# Altium PCB SP1100RS_V5.0.1.PcbDoc (part 1 of 2)
Units mm, origin at the board's own origin, x right, y up, seen from the top; angles counter-clockwise.
Board outline 126.12 x 87.13 mm, 4 copper layers (TopLayer, GND, PWR, BottomLayer); 167 components, 107 nets, 539 pads, 176 vias.
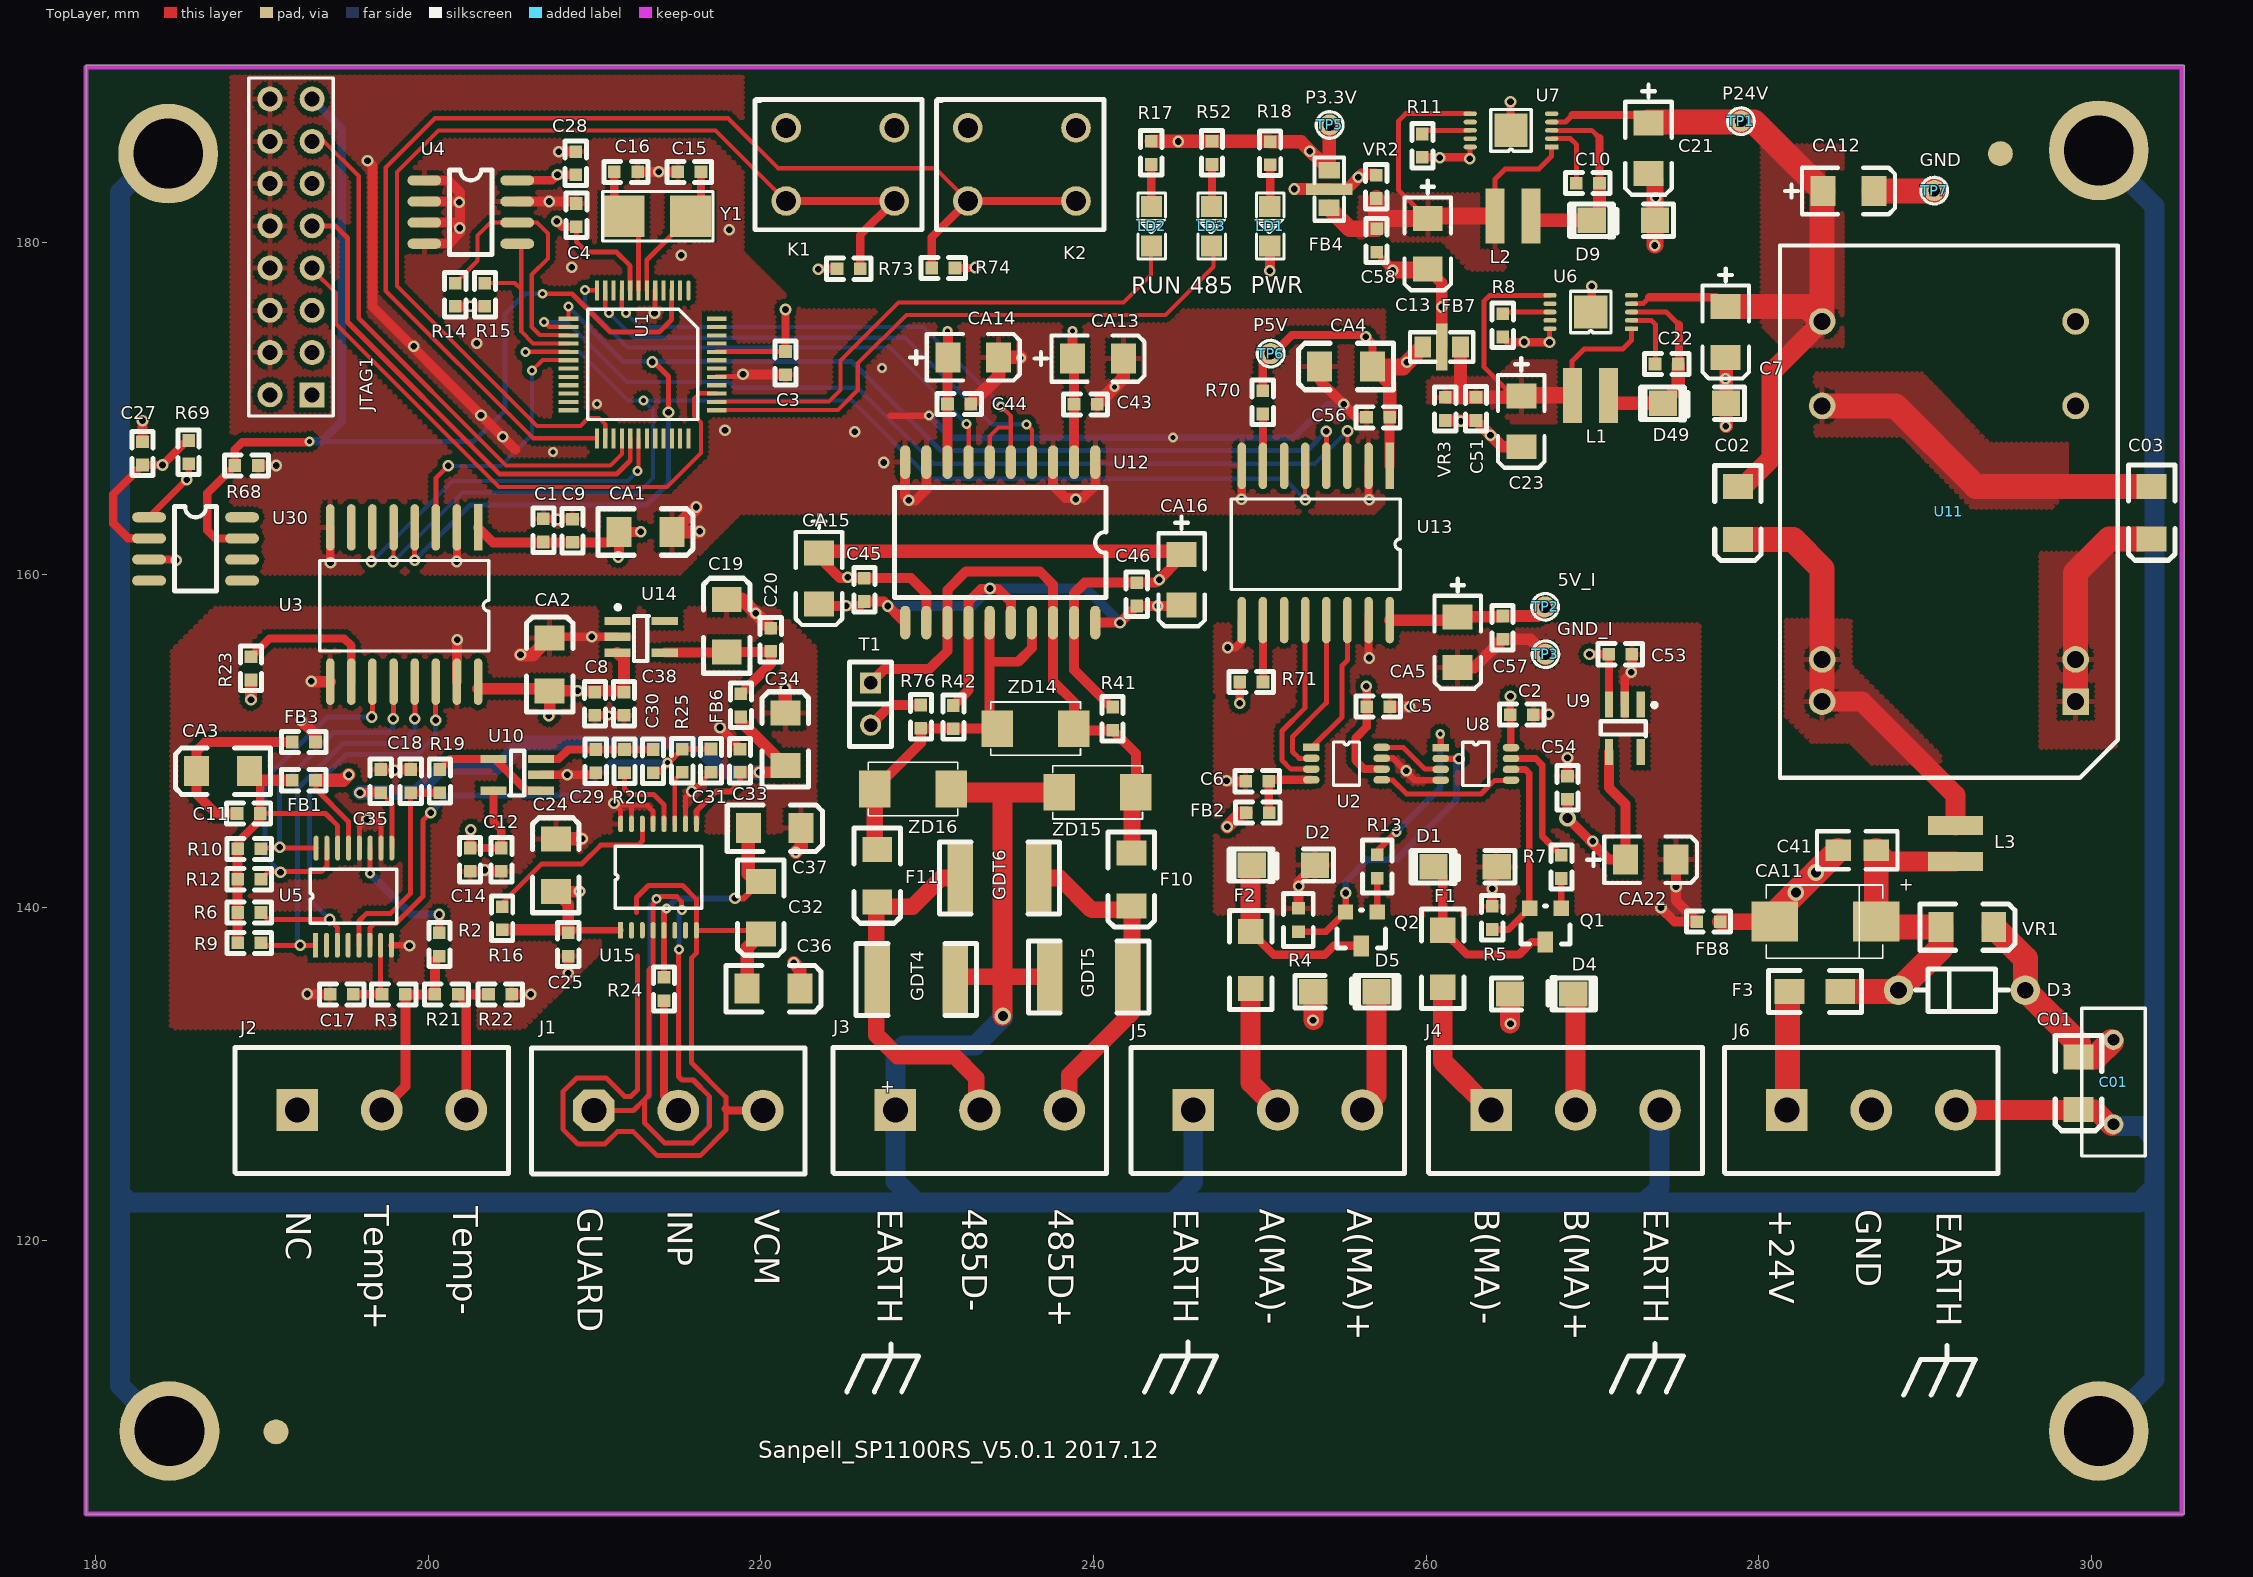
[diagram p0: TopLayer view]
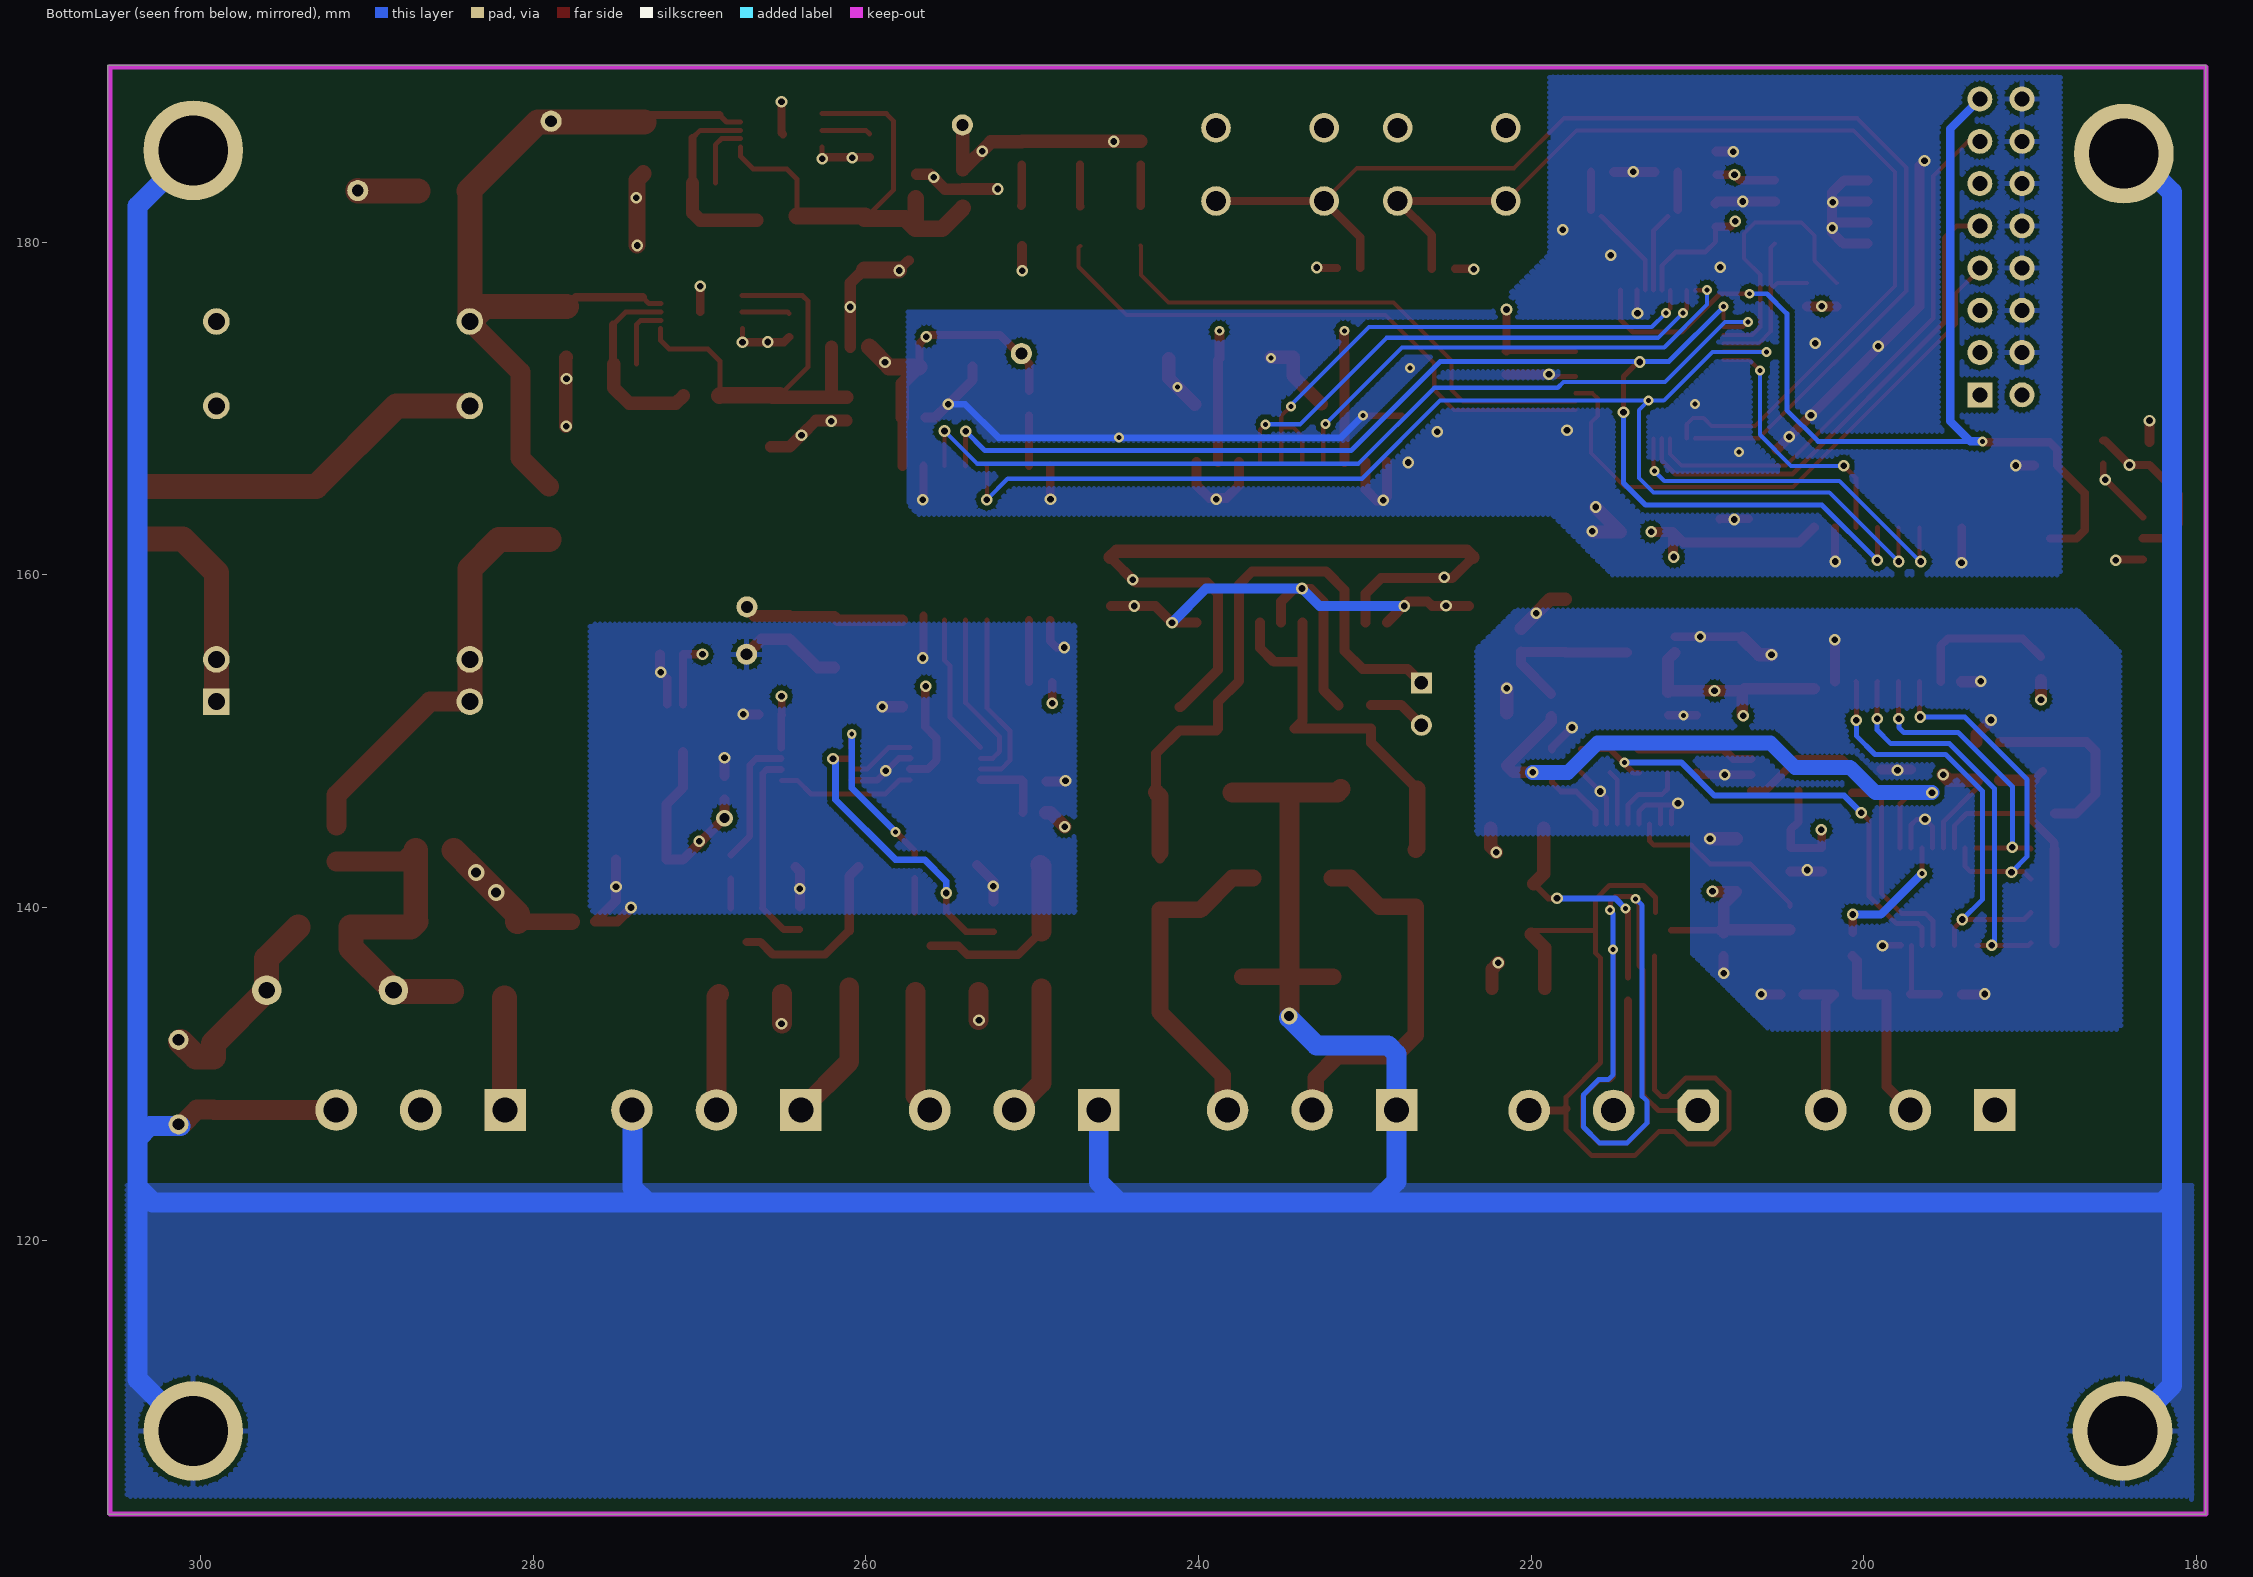
[diagram p1: BottomLayer view, seen from below]
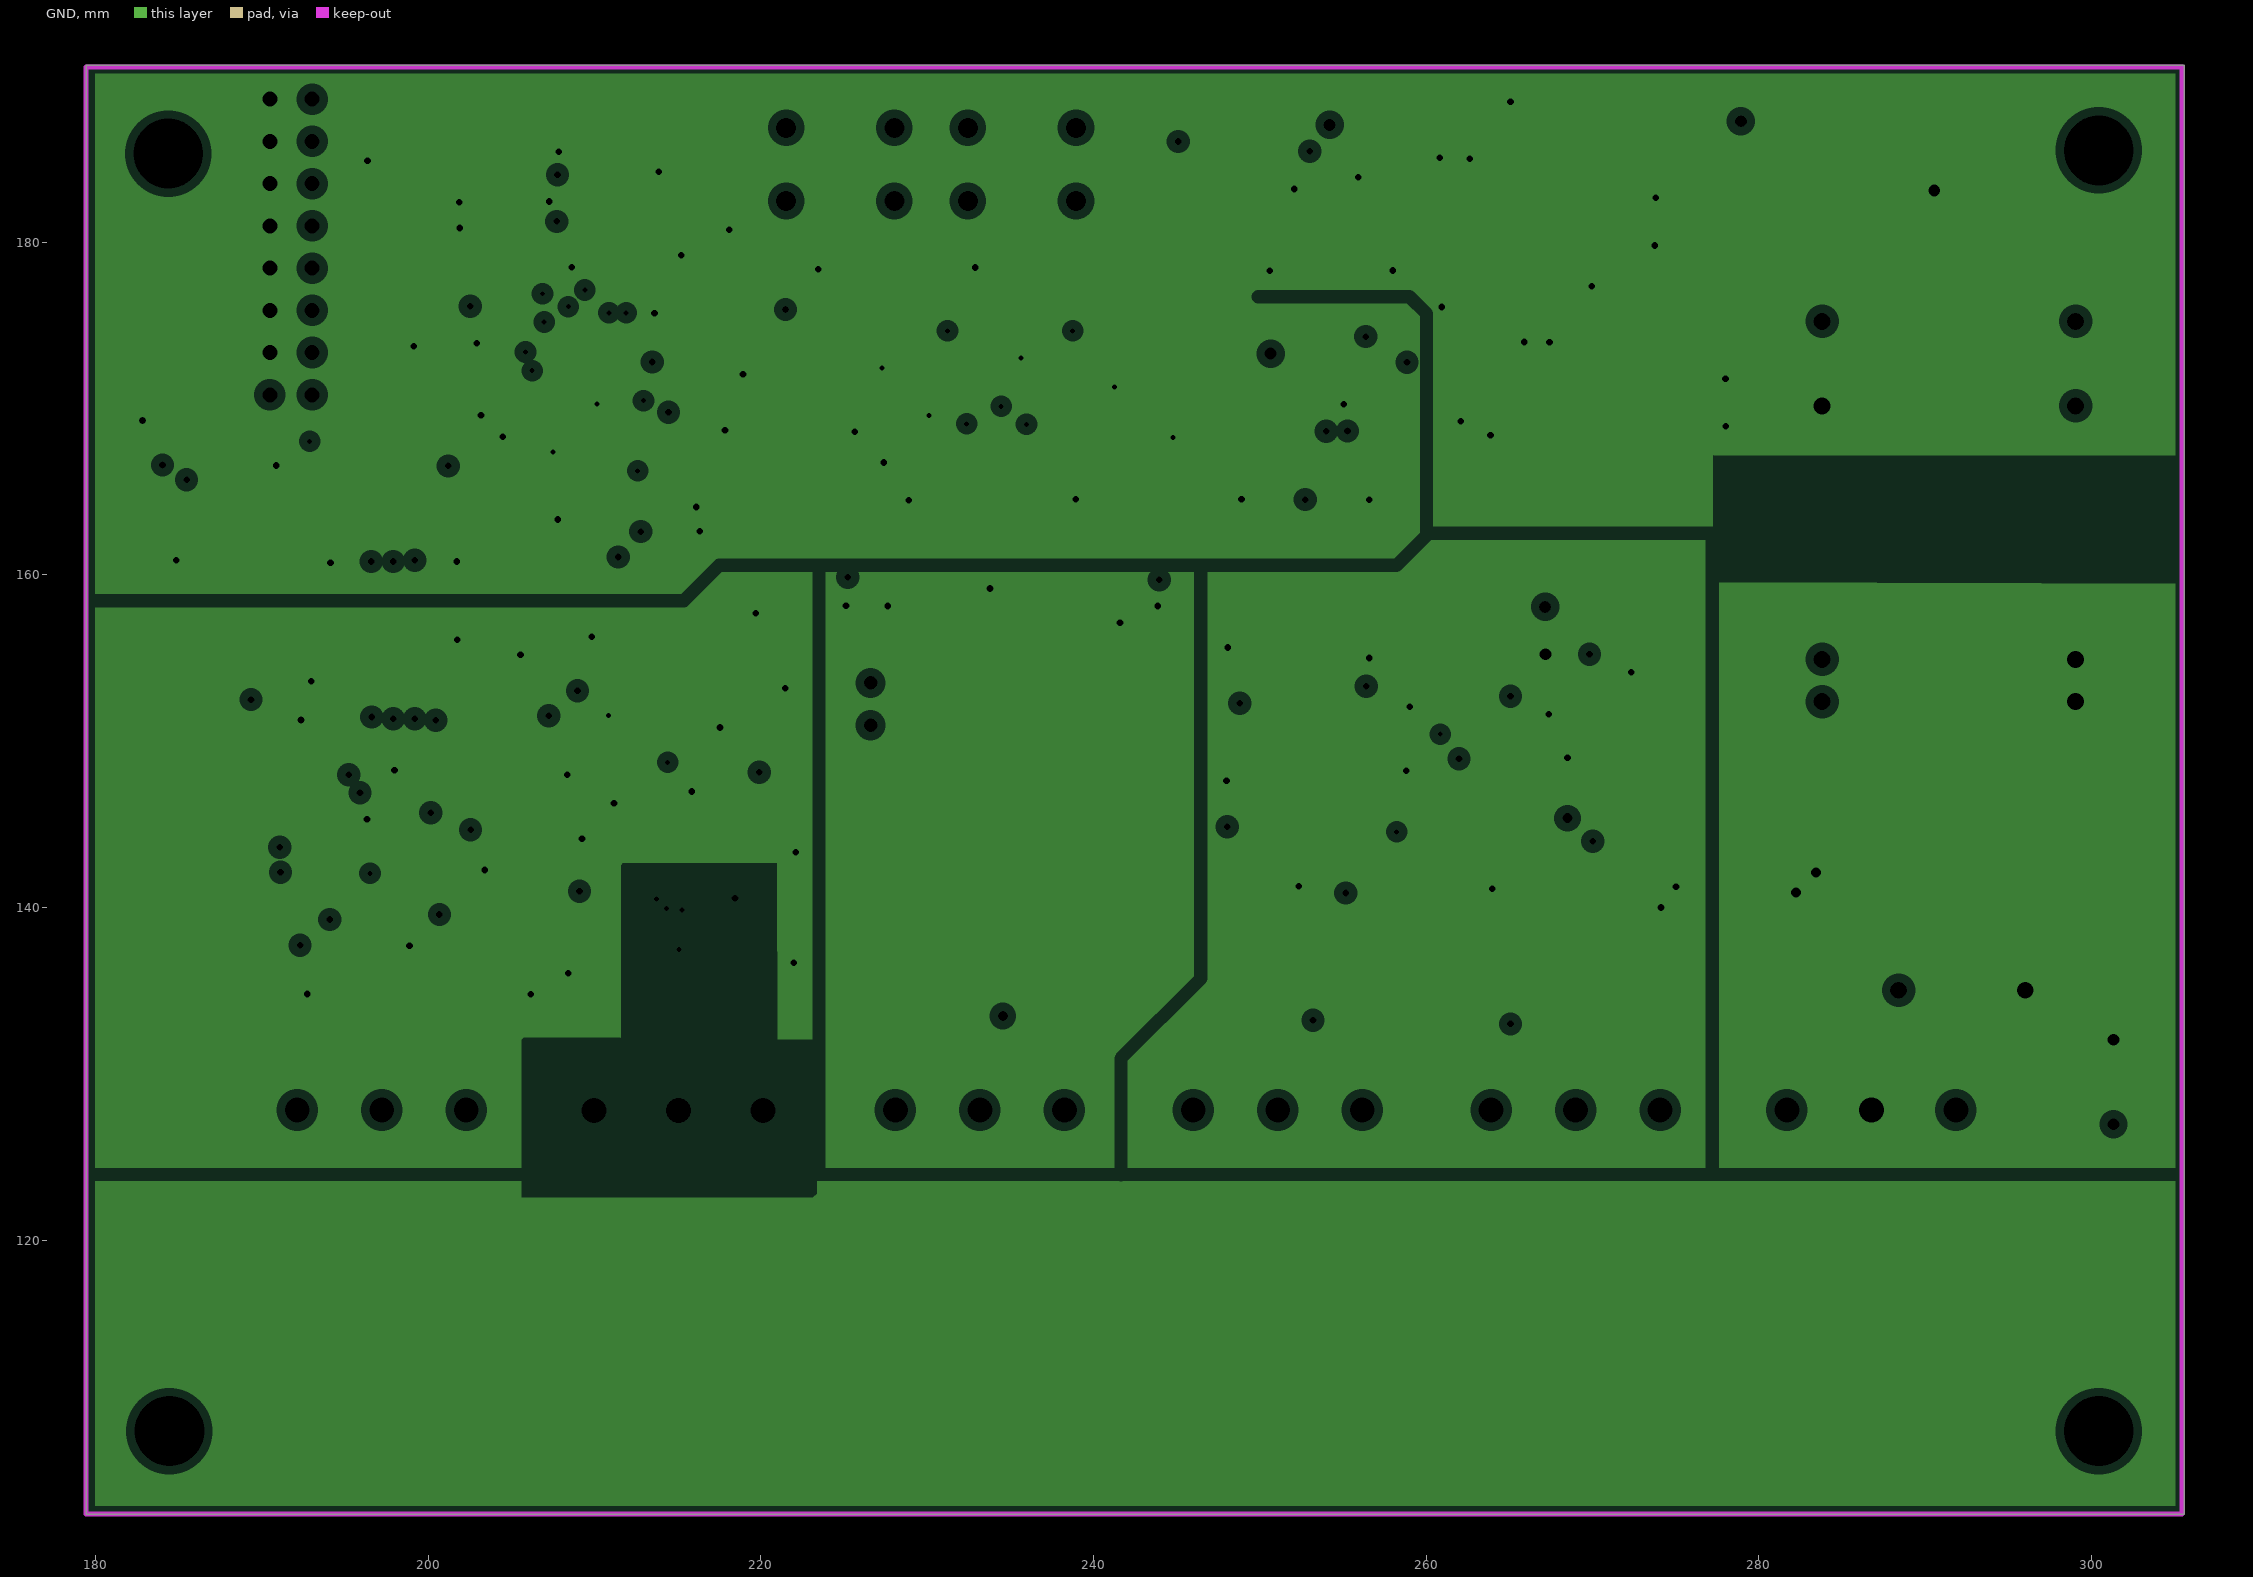
[diagram p2: GND, clearances drawn from the general rule]
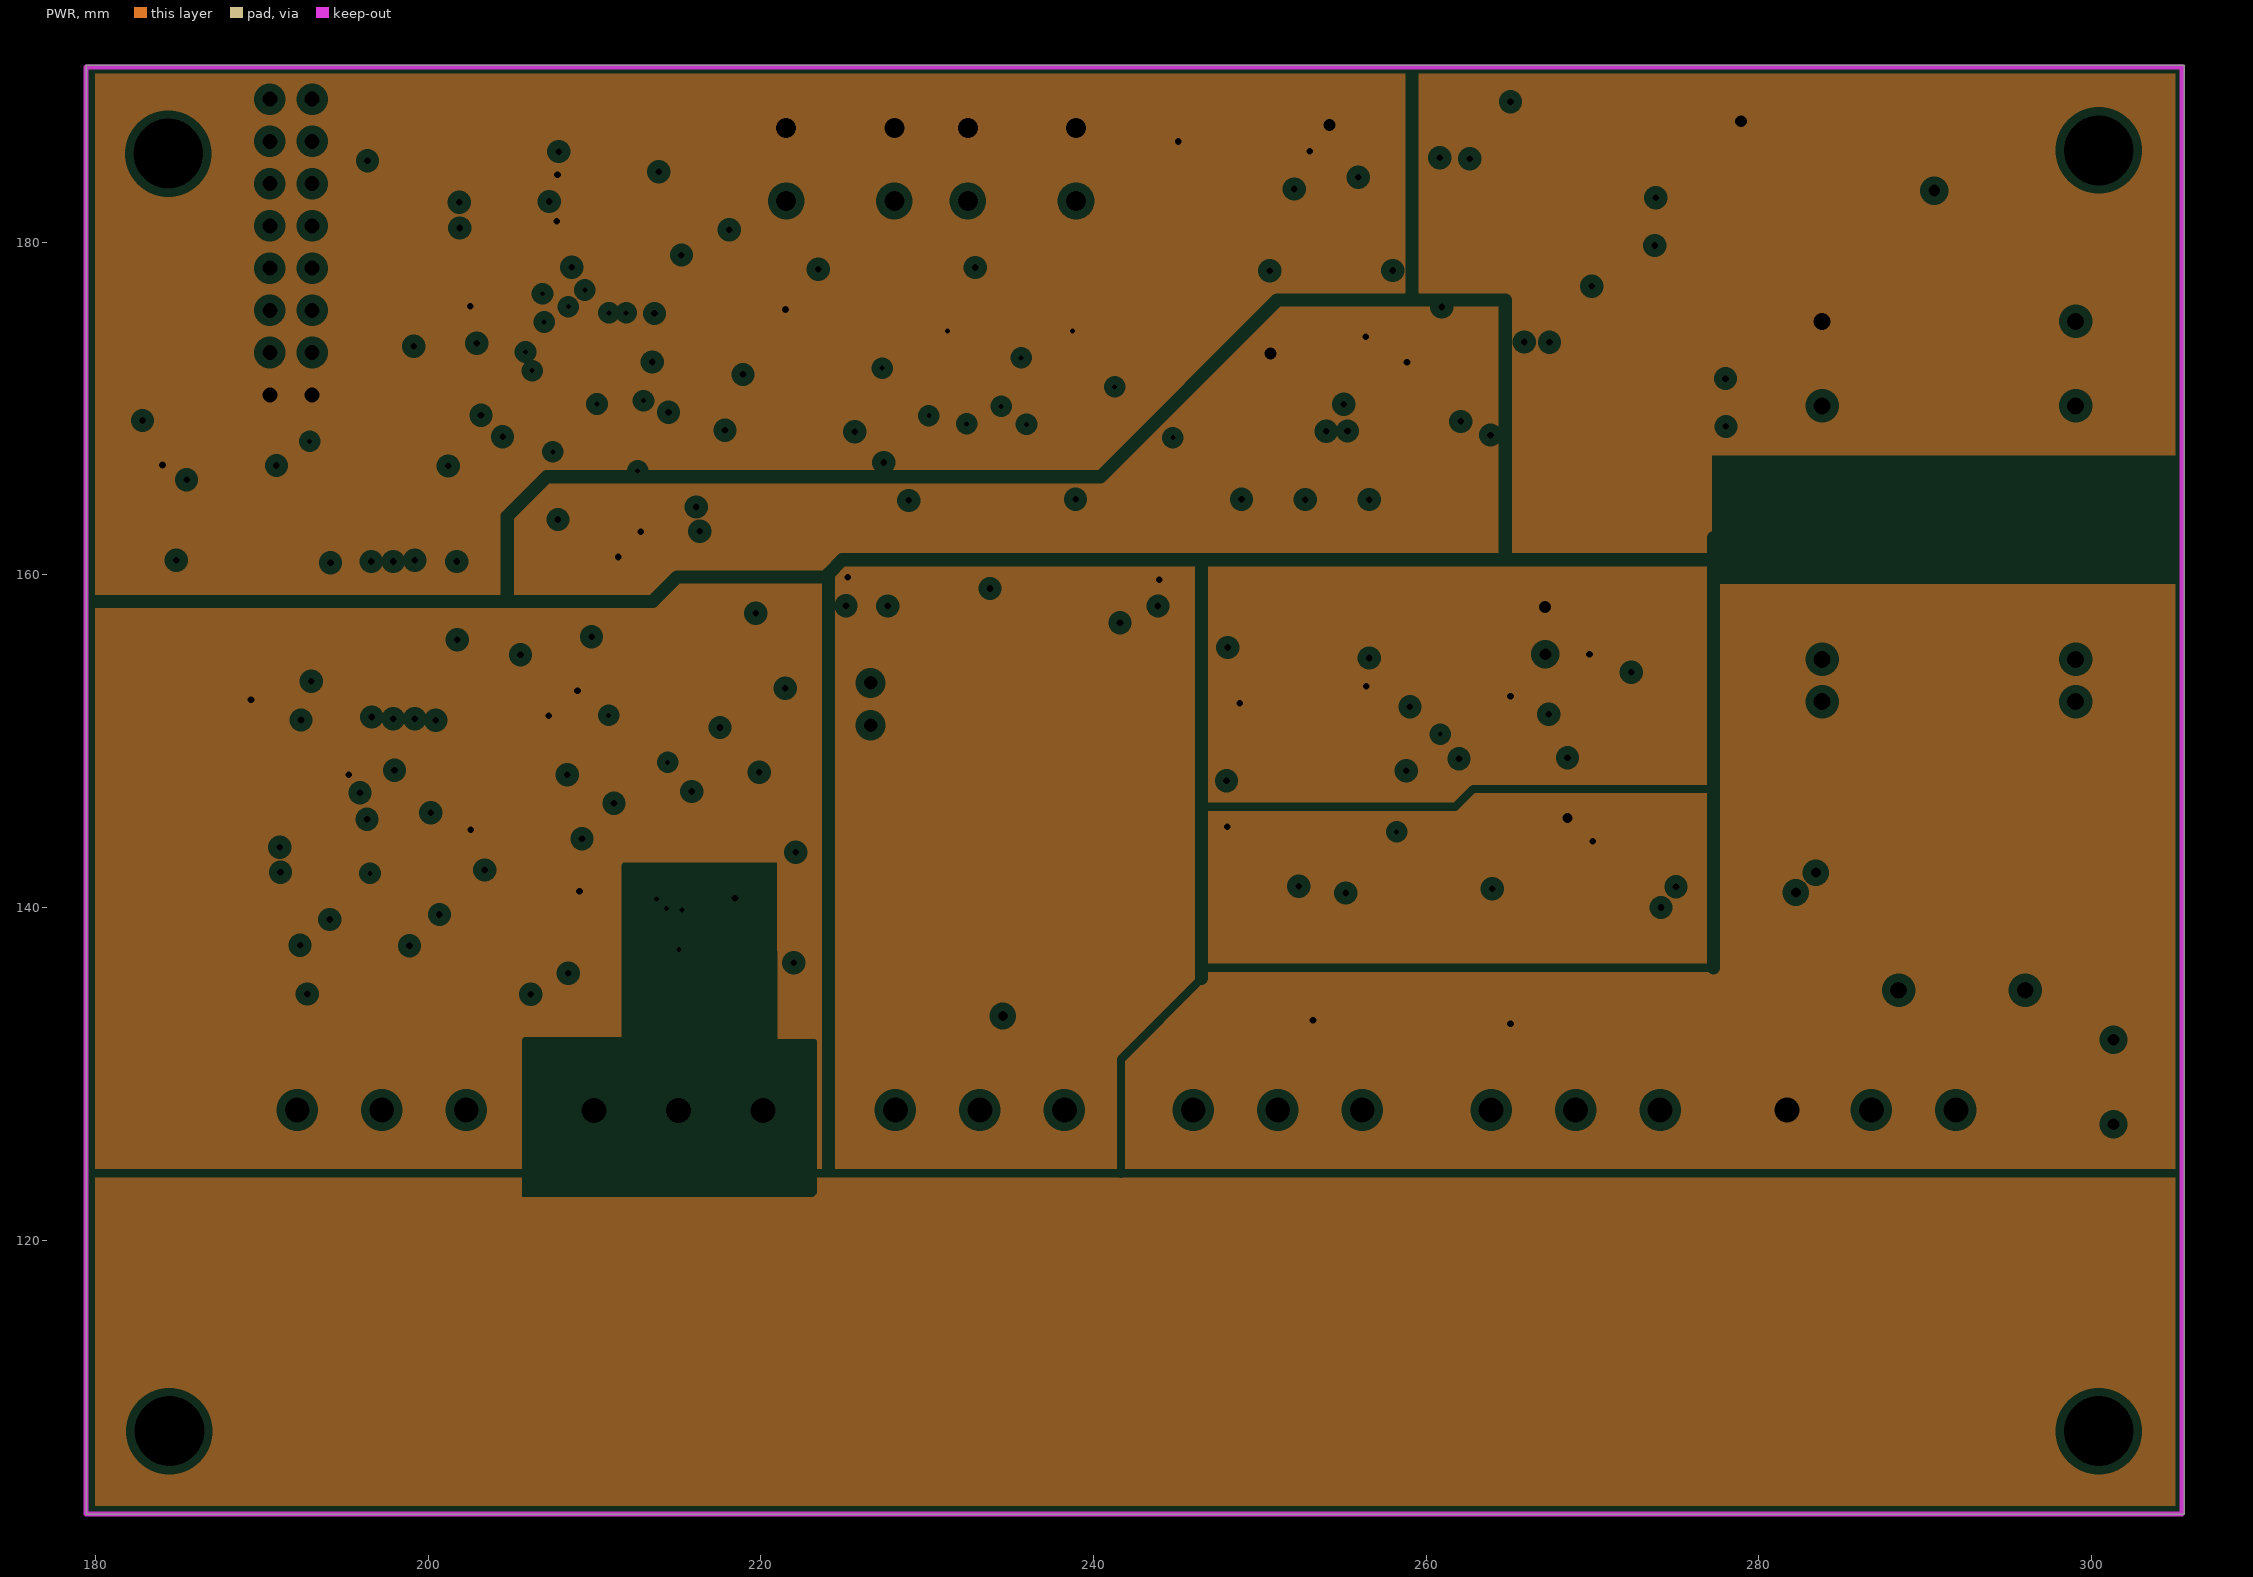
[diagram p3: PWR, clearances drawn from the general rule]

## Layer stack, top to bottom
TopLayer: signal copper 0.0356
Dielectric: core 0.32, FR-4, Dk 4.8
GND: plane copper 0.0356, net (Multiple Nets)
Dielectric: prepreg 0.32, FR-4, Dk 4.8
PWR: plane copper 0.0356, net (Multiple Nets)
Dielectric: core 0.32, FR-4, Dk 4.8
BottomLayer: signal copper 0.0356

## Board outline
179.45,103.522 305.569,103.522 305.569,190.649 179.45,190.649

## Design rules (kind name [scope] priority, off if disabled: settings)
Clearance Clearance_poly [InPolygon] p1: gap=0.3
Clearance [All] p2: gap=0.15
ComponentClearance [All] p1: gap=0.15 collisioncheckmode=3 verticalgap=0.254 showdistances=FALSE
FabricationTestPointUsage TestPointUsage [All] p1: valid=0 allowmultiple=FALSE
FabricationTestpoint Testpoint [All] p1: side=3 testpointundercomponent=TRUE minsize=1.016 maxsize=2.54 preferedsize=1.524 minholesize=0.508 maxholesize=1.016 preferedholesize=0.813 testpointgrid=0.025 allowsidetop=TRUE allowsidebottom=TRUE usegrid=TRUE gridtolerance=0
HoleSize [All] p1: absolutevalues=TRUE maxlimit=5.08 minlimit=0.025 maxpercent=80.000 minpercent=20.000
MinimumSolderMaskSliver [All] p1: minsoldermaskwidth=0.15
PlaneClearance [All] p1: clearance=0.5
PlaneConnect [All] p1: planeconnectstyle=Relief reliefexpansion=0.5 reliefentries=4 reliefconductorwidth=0.3 reliefairgap=0.3
PolygonConnect PolygonConnect_via [IsVia] p1: connectstyle=Direct reliefconductorwidth=0.254 reliefentries=4 polygonreliefangle="90 Angle"
PolygonConnect [All] p2: connectstyle=Relief reliefconductorwidth=0.3 reliefentries=4 polygonreliefangle="90 Angle"
RoutingVias [All] p1: holewidth=0.305 width=0.61 viastyle="Through Hole" minholewidth=0.254 minwidth=0.508 maxholewidth=2 maxwidth=5
SilkToSilkClearance [All] p1: silktosilkclearance=0
SilkscreenOverComponentPads [All] p1: minsilkscreentomaskgap=0
SolderMaskExpansion [All] p1: expansion=0.102
Width [All] p1: maxlimit=5.08 minlimit=0.1 preferedwidth=0.254
19 further rules are at their usual default settings.

## Components (designator, comment, footprint, x,y, rotation, side; value= is the part's Value field where it differs from the comment)
C1 "10nF" 0603A 206.925,161.975 r90 top
C01 "1nF/2kV" 1206#1 299.225,127.975 r270 top
C01 "Comment" RAD-0.2 301.325,129.5 r270 top
C2 "0.1uF" 0603 265.049,151.593 r0 top
C02 "1nF/2kV" 1206#1 278.75,162.25 r270 top
C3 "0.1uF" 0603 221.484,173.432 r270 top
C03 "1nF/2kV" 1206#1 303.625,162.275 r270 top
C4 "0.1uF" 0603 208.911,180.925 r90 top
C5 "0.1uF" 0603 256.425,152.075 r0 top
C6 "0.1uF" 0603 250.548,147.587 r180 top
C7 "4.7uF/50V" 1206C 278.01,176.125 r270 top
C8 "0.1uF" 0603A 210.025,152.95 r270 top
C9 "0.1uF" 0603A 208.675,163.35 r270 top
C10 "0.47uF" 0603 269.025,183.55 r0 top
C11 "0.1uF" 0603A 189.9,145.65 r180 top
C12 "10nF" 0603A 204.4,143.575 r270 top
C13 "22uF" 1206C 260.1,181.425 r270 top
C14 "0.1uF" 0603A 202.525,143.575 r270 top
C15 "22pF" 0603 216.404,184.227 r180 top
C16 "22pF" 0603 211.197,184.227 r0 top
C17 "1uF" 0603A 195.5,134.775 r180 top
C18 "1uF" 0603A 198.95,146.9 r90 top
C19 "10uF" 1206#1 217.95,158.4 r90 top
C20 "0.1uF" 0603A 220.6,155.4 r90 top
C21 "4.7uF/50V" 1206C 273.375,187.175 r270 top
C22 "0.47uF" 0603 273.76,172.675 r0 top
C23 "22uF" 1206C 265.725,170.75 r270 top
C24 "10uF" 1206#1 207.675,144 r90 top
C25 "0.1uF" 0603A 208.425,138.475 r270 top
C27 "0.1uF" 0603A 182.825,166.6 r90 top
C28 "0.1uF" 0603 208.875,184.05 r90 top
C29 "0.1uF" 0603A 210.075,148.1 r90 top
C30 "100pF" 0603A 213.525,149.5 r270 top
C31 "0.1uF" 0603A 217,149.525 r270 top
C32 "1nF/2kV" 1206#1 220,138.525 r270 top
C33 "0.1uF" 0603A 218.75,148.125 r90 top
C34 "10uF" 1206#1 221.475,151.575 r90 top
C35 "0.1uF" 0603A 197.15,146.9 r90 top
C36 "1nF/2kV" 1206#1 222.225,135.125 r0 top
C37 "1nF/2kV" 1206#1 222.3,144.775 r0 top
C38 "0.1uF" 0603A 211.775,152.95 r270 top
C41 "1uF/50V" 0805 287.075,143.45 r180 top
C43 "0.1uF" 0603 238.825,170.25 r0 top
C44 "0.1uF" 0603 231.225,170.275 r0 top
C45 "0.1uF" 0603 226.225,159.797 r270 top
C46 "0.1uF" 0603 242.6,158.128 r90 top
C51 "0.1uF" 0603 263,170.675 r270 top
C53 "0.1uF" 0603 270.975,155.225 r0 top
C54 "0.1uF" 0603 268.5,146.5 r90 top
C56 "0.1uF" 0603 257.81,169.471 r180 top
C57 "0.1uF" 0603 264.6,157.525 r270 top
C58 "0.1uF" 0603 257.025,180.8 r270 top
CA1 "10uF" 1206#1 214.525,162.575 r0 top
CA2 "10uF" 1206#1 207.3,156.075 r90 top
CA3 "10uF" 1206#1 186.2,148.2 r180 top
CA4 "10uF" 1206#1 253.725,172.525 r180 top
CA5 "10uF" 1206C 261.9,157.475 r270 top
CA11 "100uF/50V" D 287.05,139.15 r180 top
CA12 "10uF/50V" 1206C 283.875,183.075 r0 top
CA13 "10uF" 1206C 238.75,173 r0 top
CA14 "10uF" 1206C 231.25,173.075 r0 top
CA15 "10uF" 1206C 223.5,161.3 r270 top
CA16 "10uF" 1206C 245.3,161.225 r270 top
CA22 "10uF" 1206C 271.975,142.875 r0 top
D1 "SMF26AG" 1206D 264.05,142.45 r180 top
D2 "SMF26AG" 1206D 253.125,142.55 r180 top
D3 "1N4007" 1N4007 296.025,135.025 r180 top
D4 "CD1607-B140" 1206D 265.233,134.8 r0 top
D5 "CD1607-B140" 1206D 253.408,134.925 r0 top
D9 "CD1607-B140" 1206D 273.575,181.317 r180 top
D49 "CD1607-B140" 1206D 277.846,170.315 r180 top
F1 "1210L005WR" 1206#2 261,138.625 r270 top
F2 "1210L005WR" 1206#2 249.45,138.554 r270 top
F3 "3A" 1206#3 281.85,134.95 r0 top
F10 "FUSE1" 1206#1 242.275,140.225 r270 top
F11 "FUSE1" 1206#1 227,140.45 r270 top
FB1 "BLM18PG600SN1" 0603A 193.225,147.65 r180 top
FB2 "BLM18PG600SN1" 0603 249.178,145.7 r0 top
FB3 "BLM18PG600SN1" 0603A 193.225,149.95 r180 top
FB4 "NFM21PC105B1C3" NFM21PC105 254.175,182.05 r90 top
FB6 "BLM18PG600SN1" 0603A 218.8,152.85 r270 top
FB7 "NFM21PC105B1C3" NFM21PC105 262.075,173.7 r180 top
FB8 "BLM18PG600SN1" 0603 277.675,139.15 r180 top
GDT4 "SMD1812-091" 1812 227,135.675 r0 top
GDT5 "SMD1812-091" 1812 237.363,135.828 r0 top
GDT6 "SMD1812-091" 1812 232.001,141.775 r0 top
J1 "" PH3-S#1 209.962,127.798 r0 top
J2 "" PH3-S#2 192.13,127.823 r0 top
J3 "" PH3-S#2 228.092,127.823 r0 top
J4 "" PH3-S#2 263.906,127.823 r0 top
J5 "" PH3-S#2 245.999,127.823 r0 top
J6 "" PH3-S#2 281.686,127.823 r0 top
JTAG1 "DEBUG" HDR2X8 193.025,170.825 r90 top
K1 "SW-PB" "SW-PB ANJIAN" 224.776,184.675 r0 top
K2 "SW-PB" "SW-PB ANJIAN" 235.698,184.675 r0 top
L1 "LPS3010-472ML" LPS3010 270.96,170.775 r180 top
L2 "LPS3010-472ML" LPS3010 266.309,181.571 r180 top
L3 "4.7uH" LPS3010 291.825,142.775 r90 top
LD1 "PWR" LED0805 250.61,180.725 r0 top
LD2 "RUN" LED0805 243.5,180.725 r0 top
LD3 "485" LED0805 247.1,180.725 r0 top
Q1 "MMBT3904" SOT-23 268.13,139.952 r180 top
Q2 "MMBT3904" SOT-23 257.063,139.727 r180 top
R2 "0R" 0603A 200.675,137.075 r90 top
R3 "10K" 0603A 198.625,134.775 r180 top
R4 "100R 1%" 0603 252.325,138.55 r90 top
R5 "100R 1%" 0603 263.975,138.675 r90 top
R6 "100K" 0603A 188.55,139.7 r0 top
R7 "10K" 0603 268.13,141.738 r90 top
R8 "49.9K" 0603 264.61,174.303 r90 top
R9 "100K" 0603A 188.55,137.875 r0 top
R10 "100K" 0603A 188.55,143.525 r0 top
R11 "49.9K" 0603 259.775,185.103 r90 top
R12 "100K" 0603A 188.55,141.7 r0 top
R13 "10K" 0603 257.063,141.765 r90 top
R14 "10K" 0603 201.631,177.541 r270 top
R15 "10K" 0603 203.409,177.541 r270 top
R16 "0R" 0603A 204.45,140.05 r270 top
R17 "1K" 0603A 243.475,184.675 r90 top
R18 "1K" 0603 250.625,184.65 r90 top
R19 "10K" 0603A 200.7,148.3 r270 top
R20 "1K" 0603A 211.8,148.1 r90 top
R21 "5K 0.1%" 0603A 201.8,134.775 r180 top
R22 "0R" 0603A 203.625,134.775 r0 top
R23 "10K" 0603A 189.35,155.075 r270 top
R24 "1K" 0603A 214.175,134.4 r90 top
R25 "1K" 0603A 215.275,148.125 r90 top
R41 "47K" 0603 241.15,152.05 r270 top
R42 "47K" 0603 231.575,150.75 r90 top
R52 "1K" 0603A 247.125,184.675 r90 top
R68 "10K" 0603A 189.775,166.575 r180 top
R69 "10K" 0603A 185.6,166.675 r90 top
R70 "NC" 0603 250.175,169.675 r90 top
R71 "4.7K" 0603 248.793,153.556 r0 top
R73 "10K" 0603 224.578,178.4 r0 top
R74 "10K" 0603 231.675,178.45 r180 top
R76 "120R" 0603 229.625,150.775 r90 top
T1 "" SIP2 226.6,153.5 r270 top
TP1 "P24V" "TEST POINT" 278.925,187.275 r0 top
TP2 "5V_I" "test point" 267.15,158.075 r0 top
TP3 "GND_I" "test point" 267.175,155.225 r0 top
TP5 "P3.3V" "TEST POINT" 254.2,187.05 r0 top
TP6 "P5V" "TEST POINT" 250.65,173.3 r0 top
TP7 "GND" "TEST POINT" 290.55,183.1 r0 top
U1 "LPC1316FBD48" LPC1316 212.9,172.65 r0 top
U2 "LT2602IMS8" LT2602 255.225,148.6 r0 top
U3 "ADuM5401ARWZ" ADUM1401 203,162.85 r270 top
U4 "AT24C64D" SO-8 199.767,183.719 r0 top
U5 "AD7793BRU" AD7793 195.525,140.65 r90 top
U6 "LT3971IMSE-5" LT3971 269.9,175.8 r90 top
U7 "LT3971IMSE-3.3" LT3971 265.1,186.725 r90 top
U8 "AD8646ARMZ" AD8646 262.95,148.775 r0 top
U9 "ADR03BUJZ" AD8603 271.95,150.775 r0 top
U10 "AD8603AUJ" AD8603 205.35,147.975 r270 top
U11 "URB2424ZP-6WR3" URB2424ZP-6WR3 299.05,152.375 r90 top
U12 "ADM2587E" SOL-20 240.11,166.775 r270 top
U13 "ADuM5401ARW" ADUM1401 257.81,166.55 r270 top
U14 "ADR03BUJZ" AD8603 212.8,156.275 r90 top
U15 "LMP91200" LMP91200 213.85,141.825 r0 top
U30 "MAX708S" SO-8 183.221,163.46 r0 top
VR1 "V33MLA1206N" 1206#1 294,138.825 r0 top
VR2 "V3.5MLA0603N" 0603 257,184.025 r270 top (schematic designator VA1)
VR3 "V5.5MLA0603N" 0603 261.15,169.275 r90 top (schematic designator VA2)
Y1 "12MHz" CY5.4X4.6 215.769,181.56 r180 top
ZD14 "SMBJ12" ZD 238.825,150.75 r180 top
ZD15 "SMBJ12" ZD 242.55,146.925 r180 top
ZD16 "SMBJ12" ZD 231.45,147.125 r180 top

## Footprints (in the part's own frame and the unit in brackets; to place one, negate y for a bottom-side part, rotate by r counter-clockwise, add the part's x,y. Pads: shape width x height; smd on the part's side, far side on the other; paste and mask are expansions set on the pad)
1N4007 [mil]
  round 70 hole 40: 1(0,0) 2(300,0)
  silkscreen extent 40,-50 260,50
0603 [mil]
  rect 30x30 smd: 1(0,0) 2(55,0)
  silkscreen extent -25,-25 80,25
0603A [mil]
  rect 30x30 smd: 1(0,0) 2(55,0)
  silkscreen extent -25,-25 80,25
0805 [mil]
  rect 60x50 smd: 1(0.39,0.31) 2(90.39,0.31)
  silkscreen extent -50,-45 140,45
1206#1 [mm]
  rect 1.5x1.8 smd: 1(-3.048,0) 2(0.127,0)
  silkscreen extent -4.32,-1.4 1.4,1.4
1206#2 [mm]
  rect 1.524x1.524 smd: 1(0,0) 2(3.429,0)
  silkscreen extent -1.27,-1.27 4.7,1.27
1206#3 [mm]
  rect 1.778x1.524 smd: 1(0,0) 2(3.048,0)
  silkscreen extent -1.27,-1.27 4.32,1.27
1206C [mm]
  rect 1.5x1.8 smd: 1(0,0) 2(3.048,0)
  silkscreen extent -2.29,-1.4 4.32,1.4
1206D [mm]
  rect 1.7x1.524 smd: 1(-0.19,0.003) 2(3.61,0.003)
  silkscreen extent -1.3,-0.97 4.96,0.99
1812 [mil]
  rect 60x164.37 smd: 1(0,0) 2(185,0)
  silkscreen extent -50,-85 235,85
AD7793 [mm]
  rect 1.5x0.3 smd: 1(-2.921,2.286)
  oval 1.5x0.3 smd: 2(-2.921,1.636) 3(-2.921,0.986) 4(-2.921,0.336) 5(-2.921,-0.314) 6(-2.921,-0.964) 7(-2.921,-1.614) 8(-2.921,-2.264) 9(2.921,-2.286) 10(2.921,-1.636) 11(2.921,-0.986) 12(2.921,-0.336) 13(2.921,0.314) 14(2.921,0.964) 15(2.921,1.614) 16(2.921,2.264)
  silkscreen extent -1.59,-2.59 1.64,2.61
AD8603 [mm]
  rect 0.5x1.575 smd: 1(0.95,1.425) 2(0,1.425) 3(-0.95,1.425) 4(-0.95,-1.425) 5(0.95,-1.425)
  silkscreen extent -1.45,-0.48 1.91,1.52
AD8646 [mm]
  rect 1x0.45 smd: 1(-2.074,0.833)
  oval 1x0.45 smd: 2(-2.074,0.183) 3(-2.074,-0.467) 4(-2.074,-1.117) 5(2.156,-1.117) 6(2.156,-0.467) 7(2.156,0.183) 8(2.156,0.833)
  silkscreen extent -0.74,-1.44 0.82,1.16
ADUM1401 [mm]
  rect 2.8x0.51 smd: 1(0,0)
  oval 2.8x0.51 smd: 2(0,-1.27) 3(0,-2.54) 4(0,-3.81) 5(0,-5.08) 6(0,-6.35) 7(0,-7.62) 8(0,-8.89) 9(9.271,-8.89) 10(9.271,-7.62) 11(9.271,-6.35) 12(9.271,-5.08) 13(9.271,-3.81) 14(9.271,-2.54) 15(9.271,-1.27) 16(9.271,0)
  silkscreen extent 1.99,-9.53 7.43,0.64
CY5.4X4.6 [mm]
  rect 2.5x2.5 smd: 1(-0.025,0) 2(4,0)
  silkscreen extent -1.35,-1.49 5.28,1.49
D [mil]
  rect 110x94.49 smd: 1(0,0) 2(240,0)
  silkscreen extent -16,-87 260,87
HDR2X8 [mm] "Connector; Header; 8x2 Position"
  rect 1.5x1.5 hole 0.9: 1(0,0)
  round 1.5 hole 0.9: 2(0,2.54) 3(2.54,0) 4(2.54,2.54) 5(5.08,0) 6(5.08,2.54) 7(7.62,0) 8(7.62,2.54) 9(10.16,0) 10(10.16,2.54) 11(12.7,0) 12(12.7,2.54) 13(15.24,0) 14(15.24,2.54) 15(17.78,0) 16(17.78,2.54)
  silkscreen extent -1.27,-1.27 19.05,3.81
LED0805 [mm]
  rect 1.27x1.27 smd: A(-0.01,1.426) K(-0.01,-0.944)
  silkscreen extent -0.88,-1.75 0.83,2.24
LMP91200 [mm]
  rect 0.3x1 smd: 1(-2.275,-3.2)
  oval 0.3x1 smd: 2(-1.625,-3.2) 3(-0.975,-3.2) 4(-0.325,-3.2) 5(0.325,-3.2) 6(0.975,-3.2) 7(1.625,-3.2) 8(2.275,-3.2) 9(2.275,3.2) 10(1.625,3.2) 11(0.975,3.2) 12(0.325,3.2) 13(-0.325,3.2) 14(-0.975,3.2) 15(-1.625,3.2) 16(-2.275,3.2)
  silkscreen extent -2.6,-1.87 2.6,1.87
LPC1316 [mm]
  oval 0.25x1.2 smd: 1(2.75,4.45)
  rect 0.25x1.2 smd: 2(2.25,4.45) 3(1.75,4.45) 4(1.25,4.45) 5(0.75,4.45) 6(0.25,4.45) 7(-0.25,4.45) 8(-0.75,4.45) 9(-1.25,4.45) 10(-1.75,4.45) 11(-2.25,4.45) 12(-2.75,4.45) 25(-2.75,-4.45) 26(-2.25,-4.45) 27(-1.75,-4.45) 28(-1.25,-4.45) 29(-0.75,-4.45) 30(-0.25,-4.45) 31(0.25,-4.45) 32(0.75,-4.45) 33(1.25,-4.45) 34(1.75,-4.45) 35(2.25,-4.45) 36(2.75,-4.45)
  rect 1.2x0.25 smd: 13(-4.45,2.75) 14(-4.45,2.25) 15(-4.45,1.75) 16(-4.45,1.25) 17(-4.45,0.75) 18(-4.45,0.25) 19(-4.45,-0.25) 20(-4.45,-0.75) 21(-4.45,-1.25) 22(-4.45,-1.75) 23(-4.45,-2.25) 24(-4.45,-2.75) 37(4.45,-2.75) 38(4.45,-2.25) 39(4.45,-1.75) 40(4.45,-1.25) 41(4.45,-0.75) 42(4.45,-0.25) 43(4.45,0.25) 44(4.45,0.75) 45(4.45,1.25) 46(4.45,1.75) 47(4.45,2.25) 48(4.45,2.75)
  silkscreen extent -3.31,-3.31 3.31,3.31
LPS3010 [mm]
  rect 1.14x3.3 smd: 1(0,0) 2(2.16,0)
LT2602 [mm]
  rect 1x0.45 smd: 1(-2.127,1.023)
  oval 1x0.45 smd: 2(-2.127,0.373) 3(-2.127,-0.277) 4(-2.127,-0.927) 5(2.103,-0.927) 6(2.103,-0.277) 7(2.103,0.373) 8(2.103,1.023)
  silkscreen extent -0.79,-1.25 0.77,1.35
LT3971 [mm]
  rect 0.28x0.8 smd: 1(-1,-2.45)
  oval 0.28x0.8 smd: 2(-0.5,-2.45) 3(0,-2.45) 4(0.5,-2.45) 5(1,-2.45) 6(1,2.45) 7(0.5,2.45) 8(0,2.45) 9(-0.5,2.45) 10(-1,2.45)
  rect 2x2 smd: 11(0,0)
  silkscreen extent -1.25,-1.21 1.25,1.22
NFM21PC105 [mm]
  rect 1x1.27 smd: 1(0.01,0.008) 2(2.286,0)
  rect 0.7x2.8 smd: 3(1.143,0)
  silkscreen extent -0.76,-0.89 3.05,0.89
PH3-S#1 [mm]
  oct 2.5x2.5 hole 1.5: 1(0,0)
  round 2.5 hole 1.5: 2(5.08,0) 3(10.16,0)
  silkscreen extent -3.75,-3.81 12.7,3.75
PH3-S#2 [mm]
  rect 2.5x2.5 hole 1.5: 1(0,0)
  round 2.5 hole 1.5: 2(5.08,0) 3(10.16,0)
  silkscreen extent -3.75,-3.81 12.7,3.75
RAD-0.2 [mm] "Radial Cap, Thru-Hole; 2 Leads; 0.2 in Pin Spacing"
  round 1.2 hole 0.7: 1(-2.54,0) 2(2.54,0)
  silkscreen extent -4.44,-1.91 4.44,1.91
SIP2 [mil]
  rect 50x50 hole 32: 1(0,0)
  round 50 hole 32: 2(100,0)
  silkscreen extent -50,-50 150,50
SO-8 [mil]
  oval 80x24 smd: 1(0,0) 2(0,-50) 3(0,-100) 4(0,-150) 5(220,-150) 6(220,-100) 7(220,-50) 8(220,0)
  silkscreen extent 60,-175 160,25
SOL-20 [mil]
  oval 80x24 smd: 1(0,0) 2(0,-50) 3(0,-100) 4(0,-150) 5(0,-200) 6(0,-250) 7(0,-300) 8(0,-350) 9(0,-400) 10(0,-450) 11(380,-450) 12(380,-400) 13(380,-350) 14(380,-300) 15(380,-250) 16(380,-200) 17(380,-150) 18(380,-100) 19(380,-50) 20(380,0)
  silkscreen extent 60,-475 320,25
SOT-23 [mil]
  rect 36x36 smd: 1(0,0) 2(75,0)
  rect 36x50 smd: 3(38,80)
  silkscreen extent -20,-5 95,85
"SW-PB ANJIAN" [mm]
  round 1.778 hole 1.2: 1(-3.25,2.2) 1(3.25,2.2) 2(-3.25,-2.2) 2(3.25,-2.2)
  silkscreen extent -5.13,-3.93 4.93,3.9
"TEST POINT" [mil]
  round 50 hole 28: 1(0,0)
  silkscreen extent -31,-31 31,31
"test point" [mil]
  round 50 hole 28: 1(0,0)
  silkscreen extent -31,-31 31,31
URB2424ZP-6WR3 [mm] "isolated DC-DC converter, 6W"
  rect 1.6x1.6 hole 1.016: 2(0,0)
  round 1.6 hole 1.016: 3(2.54,0) 9(17.78,0) 11(22.86,0) 14(22.86,15.24) 16(17.78,15.24) 22(2.54,15.24) 23(0,15.24)
  silkscreen extent -4.57,-2.54 27.43,17.78
ZD [mm]
  rect 1.9x2.2 smd: 1(0,0) 2(4.6,0)
  silkscreen extent -0.4,-1.6 5,1.6

## Part data
C1 C8 C9 C11 C17 C43 C44 C45 C46: library part C, "电?"
C01 C2 C02 C3 C03 C4 C5 C6 C10 C15 C16 C20 C22 C25 C27 C28 C29 C30 C31 C32 C33 C35 C36 C37 C38 C41 C51 C53 C54 C56 C57 C58: library part CAP, "Capacitor"
C7 C13 C21 C23 CA13 CA14 CA15 CA16 CA22: library part CAPE, "极?"
C12 C14 C18: library part CAP, "电?"
C19 C24 C34 CA1 CA2 CA3 CA4 CA5 CA11 CA12: library part C, "极?"
D1 D2: library part ZENER3, "Zener Diode"
D3: library part "Diode 1N4007", "1 Amp General Purpose Rectifier"
D4 D5 D9 D49: library part DIODE, "Diode"
F1 F2: library part FUSE2, "Fuse"
F3: library part FUSE1, "Fuse"
F10 F11: "Fuse"
FB1 FB3 L1 L2 L3: library part INDUCTOR
FB2 FB4 FB6 FB7 FB8: library part Inductor, "Inductor"
GDT4 GDT5 GDT6: library part BT90
J1 J2 J3 J4 J5 J6: library part CON3, "Connector"
JTAG1: library part "HEADER 10X2"
K1 K2: "Switch"
LD1 LD2 LD3: library part LED
R2 R3 R6 R9 R10 R12 R16 R20 R21 R22 R23 R24 R25 R41 R42 R76: library part R, "电?"
R4 R5 R7 R8 R11 R13 R14 R15 R17 R18 R52 R68 R69 R70 R71 R73 R74: library part RE, "电?"
R19: library part RES, "电?"
T1: library part CON2, "Connector"
TP1 TP2 TP3 TP5 TP6 TP7: library part PAD
U2: library part LT2602
U3 U13: library part ADUM1401, "1Mbps Data Rate, 100ns Propagation delay"
U4: library part 24C01/02/04/08/16
U5: library part AD7793
U6 U7: library part LT3971
U8: library part AD8646
U9 U14: library part ADR03AUJZ
U10: library part AD8603
U30: library part SP708
VR1: library part "Res Varistor", "Varistor (Voltage-Sensitive Resistor)"
VR2 VR3: library part "D Zener", "Zener Diode"
Y1: library part CRYSTAL, "Crystal"
ZD14 ZD15 ZD16: library part SMBJ, "Ë²±"

## Free pads (board coordinates)
  round 6 hole 4.2: 0(184.37,185.323) 4(300.442,185.522) 6(184.442,108.522) 7(300.442,108.522)
  round 1.5 smd: ""(190.85,108.475) ""(294.525,185.325)

## Via types
v1: diameter 0.7, hole 0.4, TopLayer to BottomLayer, 140 vias
v2: diameter 0.6, hole 0.3, TopLayer to BottomLayer, 32 vias
v3: diameter 1, hole 0.6, TopLayer to BottomLayer, 4 vias

## Nets (pads, with @x,y where several pads share a name; then routed paths per layer and width w, separated by ;. In a path a pad name is that pad's centre, name@x,y a point inside that pad or via, vN(x,y) a via of type N, cw(c..) or ccw(c..) an arc to the next point about the centre after c; other vN are vias at no path point)
24VGND_IN: C01.1 C03.2 C41.2 CA11.2 D3.1 FB8.1 J6.2 U11.2 U11.3 VR1.2 | length 34.5
  TopLayer w1: FB8.1@277.675,139.15 CA11.2@280.954,139.15
  TopLayer w1.5: CA11.2@280.954,139.15 280.954,139.617 v3(283.437,142.1) C41.2@284.779,143.442 ; VR1.2@294.127,138.825 296.025,136.927 D3.1@296.025,135.025 299.225,131.825 C01.1@299.225,131.148 ; U11.2@299.05,152.375 U11.3@299.05,154.915 299.05,160.125 301.073,162.148 C03.2@303.625,162.148 ; C01.1@299.225,131.023 300.283,131.023 C01.1@301.2,131.94
  other v3: 282.225,140.9
+24V: C02.1 C7.1 C21.1 CA12.1 TP1.1 U6.4 U7.4 U11.14 | length 50.6
  TopLayer w0.3: U7.4@267.527,187.229 268.379,187.229 268.8,187.65 ; U6.4@272.318,176.306 273.035,176.306 273.424,176.695
  TopLayer w0.5: 268.8,187.65 272.9,187.65 C21.1@273.325,187.225 ; 273.424,176.695 277.44,176.695 C7.1@278.01,176.125
  TopLayer w0.8: C21.1@273.325,187.225 C21.1@273.375,187.175 ; C7.1@278.01,176.05 C7.1@278.01,176.125
  TopLayer w1.2: C02.1@279.05,165.298 280.775,167.023 280.775,172.2 U11.14@283.81,175.235
  TopLayer w1.5: C21.1@273.325,187.225 279.725,187.225 CA12.1@283.875,183.075 283.81,183.01 U11.14@283.81,175.235 282.92,176.125 C7.1@278.01,176.125
+24V_IN: D4.1 D5.1 F3.1 J6.1 | length 10.2
  TopLayer w1.2: v1@253.217,133.242 D5.1@253.217,134.928 ; v1@265.042,133.033 D4.1@265.042,134.803
  TopLayer w1.5: J6.1@281.686,127.823 281.725,127.862 F3.1@281.725,134.55
  other v1: 265.075,133 253.2,133.225
A_UART5: F10.2 GDT5.2 GDT6.2 J3.3 | length 20.1
  TopLayer w0.8: J3.3@238.252,127.823 J3.3@238.552,128.123
  TopLayer w1: GDT6.2@236.7,141.775 237.975,141.775 239.889,139.861 242.316,139.861 242.316,133.691 238.552,129.927 J3.3@238.552,128.123
B_UART5: F11.2 GDT4.1 GDT6.1 J3.2 | length 22.6
  TopLayer w1: GDT6.1@232.001,141.775 230.85,141.775 229.121,140.046 226.949,140.046 226.949,132.334 228.219,131.064 231.636,131.064 232.95,129.75 232.95,128.045 J3.2@233.172,127.823
CURA: F1.2 J4.1 | length 8.6
  TopLayer w1.2: F1.2@261,135.196 261,130.729 J4.1@263.906,127.823
CURB: F2.2 J5.2 | length 8
  TopLayer w1.2: F2.2@249.45,135.125 249.45,129.452 J5.2@251.079,127.823
DA_CS#: U2.1 U13.14 | length 8.6
  TopLayer w0.3: U2.1@253.111,149.619 254.95,151.458 254.95,154.546 255.27,154.866 U13.14@255.27,157.279
DA_DIN: U2.3 U13.12 | length 11
  TopLayer w0.3: U13.12@252.73,157.279 252.73,152.005 251.333,150.608 251.333,148.857 251.871,148.319 U2.3@253.111,148.319
DA_SCLK: U2.2 U13.13 | length 10.1
  TopLayer w0.3: U2.2@253.111,148.969 252.364,148.969 251.968,149.365 251.968,150.268 254,152.3 U13.13@254,157.279
DE485: U1.9 U12.5 U12.6 | length 33
  TopLayer w0.25: U1.9@211.642,177.115 211.642,176.008 v2(211.9,175.75) ; U12.6@233.76,166.775 233.76,168.31 234.3,168.85 235.03,168.85 ; v2(234.45,170.125) 235.03,169.545 235.03,168.85 ; U12.5@235.03,166.775 235.03,168.85
  BottomLayer w0.25: v2(211.9,175.75) 212.75,174.9 229.75,174.9 234.45,170.2 v2(234.45,170.125)
DVDD: C11.1 CA3.1 FB1.2 R6.1 R9.1 R10.1 R12.1 U5.14 | length 19.5
  TopLayer w0.3: C11.1@189.9,145.65 193.825,145.65 194.561,144.914 U5.14@194.561,143.571
  TopLayer w0.5: R10.1@188.55,143.525 188.55,143.9 189.9,145.25 C11.1@189.9,145.65 189.9,147.548 189.798,147.65 CA3.1@189.248,148.2
  TopLayer w0.6: R9.1@188.55,137.875 R10.1@188.55,143.525
  TopLayer w0.7: CA3.1@189.798,147.65 FB1.2@191.828,147.65
E\X\R\S\T\: R69.1 U30.1 | length 4.2
  TopLayer w0.4: U30.1@183.219,163.462 U30.1@183.221,163.46 185.6,165.838 R69.1@185.6,166.675
  other v1: 185.475,165.725
EARTH: C01.2 GDT4.2 GDT5.1 J3.1 J4.3 J5.1 J6.3 pad.0 pad.4 pad.6 pad.7 ZD15.2 ZD16.1 | length 349.2
  TopLayer w0.8: J3.1@227.584,127.315 J3.1@228.092,127.823
  TopLayer w1: GDT4.2@231.902,135.828 234.525,135.828 GDT5.1@237.363,135.828
  TopLayer w1.2: ZD16.1@231.45,147.125 231.65,146.925 ZD15.2@237.95,146.925 ; v3@234.525,133.475 234.525,135.828 234.525,146.825 ; J6.3@291.846,127.823 299.2,127.823 C01.2@299.225,127.848 300.212,127.848 C01.2@301.2,126.86
  BottomLayer w1.2: pad.6@184.15,108.585 181.483,111.252 181.483,122.825 ; pad.0@184.15,185.674 181.483,183.007 181.483,122.825 ; v3@234.567,133.367 232.899,131.699 228.6,131.699 228.092,131.191 J3.1@228.092,127.823 228.092,123.533 229.35,122.275 ; J5.1@245.999,127.823 245.999,123.499 244.775,122.275 ; J4.3@274.066,127.823 274.025,127.782 274.025,123.15 273.15,122.275 ; pad.4@300.442,185.522 303.784,182.18 303.784,126.125 ; pad.7@300.875,108.725 303.784,111.634 303.784,123.175 ; C01.2@301.2,126.86 303.049,126.86 303.784,126.125 ; 181.483,122.825 182.033,122.275 229.35,122.275 ; 229.35,122.275 244.775,122.275 ; 244.775,122.275 273.15,122.275 ; 273.15,122.275 302.884,122.275 303.784,123.175 ; 303.784,123.175 303.784,126.125
  other v3: 234.55,133.475
GND: C1.2 C03.1 C3.2 C4.2 C7.2 C9.1 C13.2 C15.2 C16.2 C21.2 C23.2 C27.2 C28.2 C43.2 C44.2 C51.2 C56.2 C58.2 CA1.2 CA4.2 CA12.2 CA13.2 CA14.2 D9.1 D49.1 FB4.3 FB7.3 JTAG1.4 JTAG1.6 JTAG1.8 JTAG1.10 JTAG1.12 JTAG1.14 JTAG1.16 LD1.K R8.1 R11.1 R68.1 R73.1 R74.1 TP7.1 U1.5 U1.41 U3.2 U3.8 U4.1 U4.2 U4.3 U4.4 U4.7 U6.10 U6.11 U7.10 U7.11 U11.16 U12.1 U12.3 U12.9 U12.10 U13.2 U13.8 U30.3 VR2.1 VR3.1 | length 183.1
  TopLayer w0.3: v1(213.61,175.718) 213.642,175.75 U1.5@213.642,177.115 ; U1.41@217.342,171.915 218.79,171.915 v1(218.925,172.05) ; v1(262.627,185.02) U7.10@262.627,185.729 ; v1(267.418,173.991) U6.10@267.418,174.806
  TopLayer w0.4: 227.8,169.575 v2(230.1,169.575)
  TopLayer w0.5: U30.3@183.221,160.92 184.805,160.92 v1(184.85,160.875) ; U3.8@194.11,162.85 194.11,160.74 v1(194.125,160.725) ; v1(201.725,160.8) 201.73,160.805 U3.2@201.73,162.85 ; C1.2@206.925,163.372 208.653,163.372 C9.1@208.675,163.35 ; v1@223.475,178.4 R73.1@224.578,178.4 ; R74.1@231.675,178.45 v1@232.875,178.45 ; v1(248.9,164.55) 248.92,164.57 U13.8@248.92,166.55 ; U13.2@256.54,166.55 256.54,164.56 v1(256.575,164.525) ; R11.1@259.775,185.103 262.544,185.103 v1(262.627,185.02) ; R8.1@264.61,174.303 264.922,173.991 v1(267.418,173.991) ; U7.11@264.987,186.491 265.075,186.579 v1(265.075,188.45) ; U6.11@269.96,175.806 v1(269.96,177.35) v1@269.96,177.387
  TopLayer w0.6: C27.2@182.825,167.997 v1(182.825,169.275) ; R68.1@189.775,166.575 v1(190.875,166.575) ; v1(196.35,184.9) 196.65,184.6 196.65,176.125 v1(203.175,169.6) 205.25,167.525 ; U4.4@199.767,179.909 201.234,179.909 201.9,180.575 v1(201.9,180.85) 201.9,181.35 ; U4.3@199.767,181.179 201.729,181.179 201.9,181.35 ; U4.2@199.767,182.449 201.751,182.449 v1@201.9,182.3 ; U4.1@199.767,183.719 201.181,183.719 201.9,183 v1@201.9,182.3 ; U4.7@205.355,182.449 v1(207.275,182.449) 208.784,182.449 C4.2@208.911,182.322 ; v1(207.847,185.447) C28.2@208.85,185.447 ; C16.2@212.594,184.227 v1(213.864,184.227) C15.2@215.007,184.227 ; v1@218.94,172.035 C3.2@221.484,172.035 ; U12.10@228.68,166.775 228.68,164.695 v1(228.9,164.475) 229.3,164.475 229.95,165.125 U12.9@229.95,166.775 ; U12.3@237.57,166.775 237.57,165.378 238.332,164.616 239.348,164.616 240.11,165.378 U12.1@240.11,166.775 ; v1(250.6,178.275) LD1.K@250.6,179.781 ; CA4.2@253.598,172.525 253.598,171.702 v1(255.05,170.25) 255.829,169.471 C56.2@256.413,169.471 ; 257.4,178.903 257.451,178.903 v1@258.027,178.327 ; 201.9,181.35 v1@201.9,182.3
  TopLayer w0.7: v1(252.075,183.2) 254.168,183.2 FB4.3@254.175,183.193 255.243,183.193 256.125,184.075 VR2.1@256.95,184.075 ; C13.2@260.1,178.377 260.932,177.545 v1(260.932,176.1) FB7.3@260.932,173.7 ; VR3.1@261.15,169.275 261.153,169.278 C51.2@263,169.278 v1(263.875,168.403) 264.576,167.702 C23.2@265.725,167.702
  TopLayer w0.8: v1@216.125,164.048 CA1.2@214.652,162.575 v1@216.275,162.575 ; C44.2@232.622,170.275 234.298,171.951 CA14.2@234.298,173.075 v2@235.625,173.075 ; C43.2@240.222,170.25 v2(241.275,171.303) 241.798,171.826 CA13.2@241.798,173 ; C7.2@278.01,173.077 278.036,173.051 D49.1@278.036,170.312 v1@278.036,168.936
  TopLayer w1: v1@258.027,178.327 C13.2@260.1,178.327 ; C21.2@273.375,184.127 273.765,183.737 D9.1@273.765,181.314 v1@273.765,179.815
  TopLayer w1.5: U11.16@283.81,170.155 288.22,170.155 293.052,165.323 C03.1@303.625,165.323 ; CA12.2@286.923,183.075 290.525,183.075 TP7.1@290.55,183.1
  BottomLayer w0.4: v2@230.075,169.6 231.425,168.25 v2(244.775,168.25) 252.025,168.25 254.025,170.25 v1(255.05,170.25)
  other v1: 216.325,162.625 207.8,163.325 216.125,164.075 238.925,164.55 227.4,166.75 204.475,168.3 225.65,168.6 217.85,168.7 278.025,168.925 262.075,169.225 278,171.8 199.125,173.75 202.925,173.925 265.9,174 258,178.3 223.45,178.375 232.9,178.475 208.625,178.5 215.225,179.225 273.75,179.8 218.1,180.75 201.875,182.4 273.8,182.675 255.925,183.9 260.825,185.075
  other v2: 207.5,167.4 210.15,170.275 227.3,172.425 235.65,173.05
GND_COM: C45.2 C46.1 CA15.2 CA16.2 R42.2 U12.11 U12.14 U12.16 U12.20 | length 37.5
  TopLayer w0.6: CA15.2@223.725,158.125 225.95,158.125 C45.2@226.225,158.4 227.403,158.4 U12.11@228.68,157.123 ; R42.2@231.575,152.147 232.49,153.062 U12.14@232.49,157.123 232.49,158.393 233.247,159.15 234.273,159.15 235.03,158.393 U12.16@235.03,157.123 ; U12.20@240.11,157.123 v1(241.595,157.123) C46.1@242.6,158.128 CA16.2@245.25,158.128
  BottomLayer w0.6: v1(227.625,158.125) 232.725,158.125 v1(233.775,159.175) 239.543,159.175 v1(241.595,157.123)
  other v1: 243.875,158.125 225.125,158.15
GND_ISO: C8.2 C12.2 C14.2 C17.2 C18.2 C19.2 C20.2 C24.2 C25.2 C29.1 C31.2 C33.2 C34.2 C35.2 C36.2 C37.2 C38.2 CA2.2 FB3.1 R22.2 U3.9 U3.15 U5.8 U5.10 U5.12 U10.2 U14.2 U15.10 U15.13 U15.15 U15.16 | length 50.3
  TopLayer w0.3: U5.12@195.861,143.571 195.861,144.836 v1(196.325,145.3) 196.825,145.3 197.161,144.964 U5.10@197.161,143.571 ; v1(211.175,146.275) 211.175,146.222 v1@211.222,146.175 ; U15.16@211.575,145.025 211.575,145.822 v1@211.222,146.175 ; U15.15@212.225,145.025 212.225,146.1 212.15,146.175 ; U15.13@213.525,145.025 213.525,145.775 213.125,146.175 212.15,146.175 ; U15.10@215.475,145.025 215.475,146.603 v1(215.85,146.978) C31.2@217,148.128 ; v1@211.222,146.175 212.15,146.175
  TopLayer w0.4: U5.8@197.789,137.729 198.846,137.729 v1(198.875,137.7)
  TopLayer w0.5: U10.2@206.775,147.975 v1(208.363,147.975) 209.95,147.975 C29.1@210.075,148.1 ; CA2.2@207.3,156.202 207.373,156.275 v1(209.825,156.275) U14.2@211.375,156.275 ; C8.2@210.025,151.553 v2(210.85,151.553) C38.2@211.775,151.553 ; v1(217.55,150.825) 218.75,149.625 C33.2@218.75,149.522
  TopLayer w0.6: v1@192.75,134.775 C17.2@194.103,134.775 ; C35.2@197.15,148.297 C18.2@198.95,148.297 ; U3.15@201.73,153.579 v1@201.73,156.08 ; C14.2@202.525,142.178 C12.2@204.4,142.178 ; R22.2@205.022,134.775 v1(206.175,134.775) ; v1(208.425,136.05) C25.2@208.425,137.078
  TopLayer w0.7: v1(192.35,151.275) 193.225,150.4 FB3.1@193.225,149.95 ; v1@192.996,153.579 U3.9@194.11,153.579
  TopLayer w0.8: v1(205.55,155.2) 206.298,155.2 CA2.2@207.3,156.202 ; C24.2@207.675,144.127 209.248,144.127 v1(209.25,144.125) ; C19.2@217.95,158.527 218.87,158.527 v1(219.7,157.697) C20.2@220.6,156.797 ; C34.2@221.475,151.702 v1(221.475,153.175) ; v1(221.975,136.675) 222.352,136.298 C36.2@222.352,135.125 ; v1(222.1,143.325) 222.427,143.652 C37.2@222.427,144.775
  other v1: 192.725,134.8 203.4,142.25 197.975,148.25 192.975,153.6 201.75,156.1
GUARD: J1.1 U15.4 | length 68.8
  TopLayer w0.3: J1.1@209.962,127.798 212.348,127.798 213,128.45 ; v2@215.05,137.65 215.05,129.825 215.25,129.625 215.925,129.625 216.925,128.625 216.925,126.85 215.925,125.85 214.2,125.85 213,127.05 213,128.45 ; v2@215.225,139.775 215.225,140.375 214.95,140.65 213.975,140.65 213.525,140.2 U15.4@213.525,138.625 213.525,136.5 213.275,136.25 213.275,128.725 213,128.45
  BottomLayer w0.3: v2(213.725,140.525) 213.325,140.125 213.325,128.65 213.025,128.35 213.025,127.05 214.225,125.85 215.9,125.85 216.85,126.8 216.85,128.75 215.95,129.65 215.375,129.65 215.075,129.95 v2(215.075,137.475) 215.075,139.65 v2(215.275,139.85)
IAGND: C2.2 C5.2 C6.2 C53.2 C54.2 C57.2 CA5.2 CA22.2 D1.1 D2.1 FB8.2 R4.2 R5.2 TP3.1 U2.7 U8.4 U9.2 U13.9 U13.15 | length 34.7
  TopLayer w0.4: U2.7@257.341,148.969 258.006,148.969 259.331,147.644 U8.4@260.858,147.644
  TopLayer w0.5: v1(248.075,155.628) 248.539,155.628 248.92,156.009 U13.9@248.92,157.279 ; U13.15@256.54,157.533 U13.15@256.54,157.279 256.54,155.035 v1(256.575,155) ; U9.2@271.95,152.2 271.95,153.775 v1(272.325,154.15)
  TopLayer w0.6: v1(248,147.625) 248.038,147.587 C6.2@249.151,147.587 ; 252.331,140.361 252.331,141.563 D2.1@253.315,142.547 ; R5.2@263.975,140.072 263.975,142.182 D1.1@264.24,142.447 ; C2.2@266.446,151.593 267.343,151.593 v1(267.375,151.625) ; C54.2@268.5,147.897 v1(268.5,149) ; v1(272.325,154.15) 272.372,154.197 C53.2@272.372,155.225 ; v1(274.125,140) 274.125,139.95 274.925,139.15 FB8.2@276.278,139.15 275.023,140.405 v1@275.023,141.252 ; CA22.2@275.023,142.875 v1@275.023,141.252 ; v1(275.025,141.25) v1@275.023,141.252
  TopLayer w0.7: C5.2@257.822,152.075 v1(259.025,152.075) ; CA5.2@261.9,154.427 262.899,154.427 C57.2@264.6,156.128 266.272,156.128 TP3.1@267.175,155.225
  other v1: 263.975,141.125 252.35,141.275 258.8,148.225
IREF2.5V: C54.1 CA22.1 FB2.1 U9.4 | length 14
  TopLayer w0.6: C54.1@268.5,146.5 v3(268.5,145.375) 271,142.875 CA22.1@271.975,142.875 271.975,146.225 271,147.2 U9.4@271,149.35
  TopLayer w0.8: v1(248.05,144.85) 248.9,145.7 FB2.1@249.178,145.7
  other v1: 270.025,143.975
ISP_RXD: U1.46
ISP_TXD: U1.47
ISPEN: U1.4
JTAG_RST: U1.35
JTAG_TCK: JTAG1.9 U1.29 | length 29.9
  TopLayer w0.3: JTAG1.9@193.025,180.985 194.415,180.985 195.15,180.25 195.15,175.2 204.3,166.05 211.325,166.05 212.15,166.875 U1.29@212.15,168.2
JTAG_TDI: U1.32
JTAG_TDO: U1.34
JTAG_TMS: U1.33
LED_S1: LD3.K U1.37 | length 35.7
  TopLayer w0.25: U1.37@217.342,169.915 224.64,169.915 225.825,171.1 225.825,172.7 228.75,175.625 244.325,175.625 247.225,178.525 247.225,179.671 LD3.K@247.115,179.781
LED_S2: LD2.K U1.38 | length 32.1
  TopLayer w0.25: U1.38@217.342,170.415 224.09,170.415 224.791,171.116 224.791,172.891 228.275,176.375 241.8,176.375 243.45,178.025 243.45,179.766 LD2.K@243.49,179.806
MISO1: U1.30 U3.6 | length 22.3
  TopLayer w0.25: v1(196.575,160.8) 196.65,160.875 U3.6@196.65,162.85 ; v2(212.6,166.25) 212.65,166.3 U1.30@212.65,168.2
  BottomLayer w0.25: v1(196.575,160.8) 196.625,160.8 201.475,165.65 212,165.65 v2(212.6,166.25)
MOSI1: U1.17 U3.5 U13.5 | length 79.8
  TopLayer w0.25: v1(197.9,160.8) 197.92,160.82 U3.5@197.92,162.85 ; v2(205.85,173.4) 205.865,173.415 U1.17@208.442,173.415 ; v1(252.725,164.525) 252.725,166.545 U13.5@252.73,166.55
  BottomLayer w0.25: v1(197.9,160.8) 197.925,160.8 202.075,164.95 212.65,164.95 213.525,165.825 213.525,169.9 v2(212.95,170.475) ; v2(205.85,173.4) 209.1,173.4 212.025,170.475 v2(212.95,170.475) ; v1(252.725,164.525) 251.475,165.775 230.175,165.775 225.475,170.475 v2(212.95,170.475)
NetC02_2: C02.2 L3.2 U11.22 U11.23 | length 25.6
  TopLayer w1.2: U11.23@283.81,152.375 286.2,152.375 291.825,146.75 L3.2@291.825,144.935
  TopLayer w1.5: C02.2@279.05,162.123 282.052,162.123 283.81,160.365 U11.22@283.81,154.915 U11.23@283.81,152.375
NetC6_1: C6.1 FB2.2 U2.4 | length 4.5
  TopLayer w0.5: FB2.2@250.575,145.7 250.548,145.727 C6.1@250.548,147.587 250.634,147.673 U2.4@253.098,147.673
NetC10_1: C10.1 U7.2 | length 4
  TopLayer w0.3: U7.2@267.527,186.229 268.678,186.229 269.051,185.856 C10.1@269.051,183.55
NetC10_2: C10.2 D9.2 L2.1 U7.3 | length 11.6
  TopLayer w0.3: U7.3@267.527,186.729 269.956,186.729 270.422,186.263
  TopLayer w0.5: C10.2@270.422,183.55 270.422,186.263
  TopLayer w0.8: L2.1@266.566,181.314 D9.2@269.965,181.314 270.422,181.771 C10.2@270.422,183.55
NetC11_2: C11.2 CA3.2 FB3.2 | length 11.5
  TopLayer w0.6: C11.2@188.503,145.65 187.25,145.65 186.073,146.827 CA3.2@186.073,148.2 186.073,149.398 186.625,149.95 FB3.2@191.828,149.95
NetC13_1: C13.1 C58.1 FB4.1 L2.2 U7.1 U7.6 VR2.2 | length 30.6
  TopLayer w0.3: C13.1@260.05,181.425 259.975,181.5 258.35,183.125 258.35,187.3 258.775,187.725 U7.6@262.65,187.725 ; L2.2@264.149,181.571 264.149,183.799 264.75,184.4 266.775,184.4 267.527,185.152 U7.1@267.527,185.729
  TopLayer w1: FB4.1@254.167,182.06 255.427,180.8 C58.1@257.025,180.8 ; VR2.2@257,182.628 257,180.825 C58.1@257.025,180.8 ; C13.1@259.975,181.5 260.046,181.571 L2.2@264.149,181.571 ; C13.1@260.1,181.425 260.05,181.425 257.65,181.425 C58.1@257.025,180.8
NetC15_1: C15.1 U1.6 Y1.1 | length 9.3
  TopLayer w0.3: U1.6@213.142,177.115 213.142,178.933 215.769,181.56 Y1.1@215.794,181.56 Y1.1@214.753,180.519
  TopLayer w0.5: Y1.1@216.404,181.941 C15.1@216.404,184.227
NetC16_1: C16.1 U1.7 Y1.2 | length 7.1
  TopLayer w0.3: Y1.2@211.769,181.56 212.642,180.687 U1.7@212.642,177.115
  TopLayer w0.5: Y1.2@211.197,181.941 C16.1@211.197,184.227
NetC17_1: C17.1 R3.2 U5.7 | length 4.7
  TopLayer w0.3: U5.7@197.139,137.729 197.139,134.864 R3.2@197.228,134.775
  TopLayer w0.5: C17.1@195.5,134.775 R3.2@197.228,134.775